# Altium PCB Ant.PcbDoc
Units mm, origin at the board's own origin, x right, y up, seen from the top; angles counter-clockwise.
Board outline 100.15 x 83.33 mm, 2 copper layers (Top Layer, Bottom Layer); 63 components, 61 nets, 249 pads, 392 vias.
Unrouted connection lines stored in the file: 1.
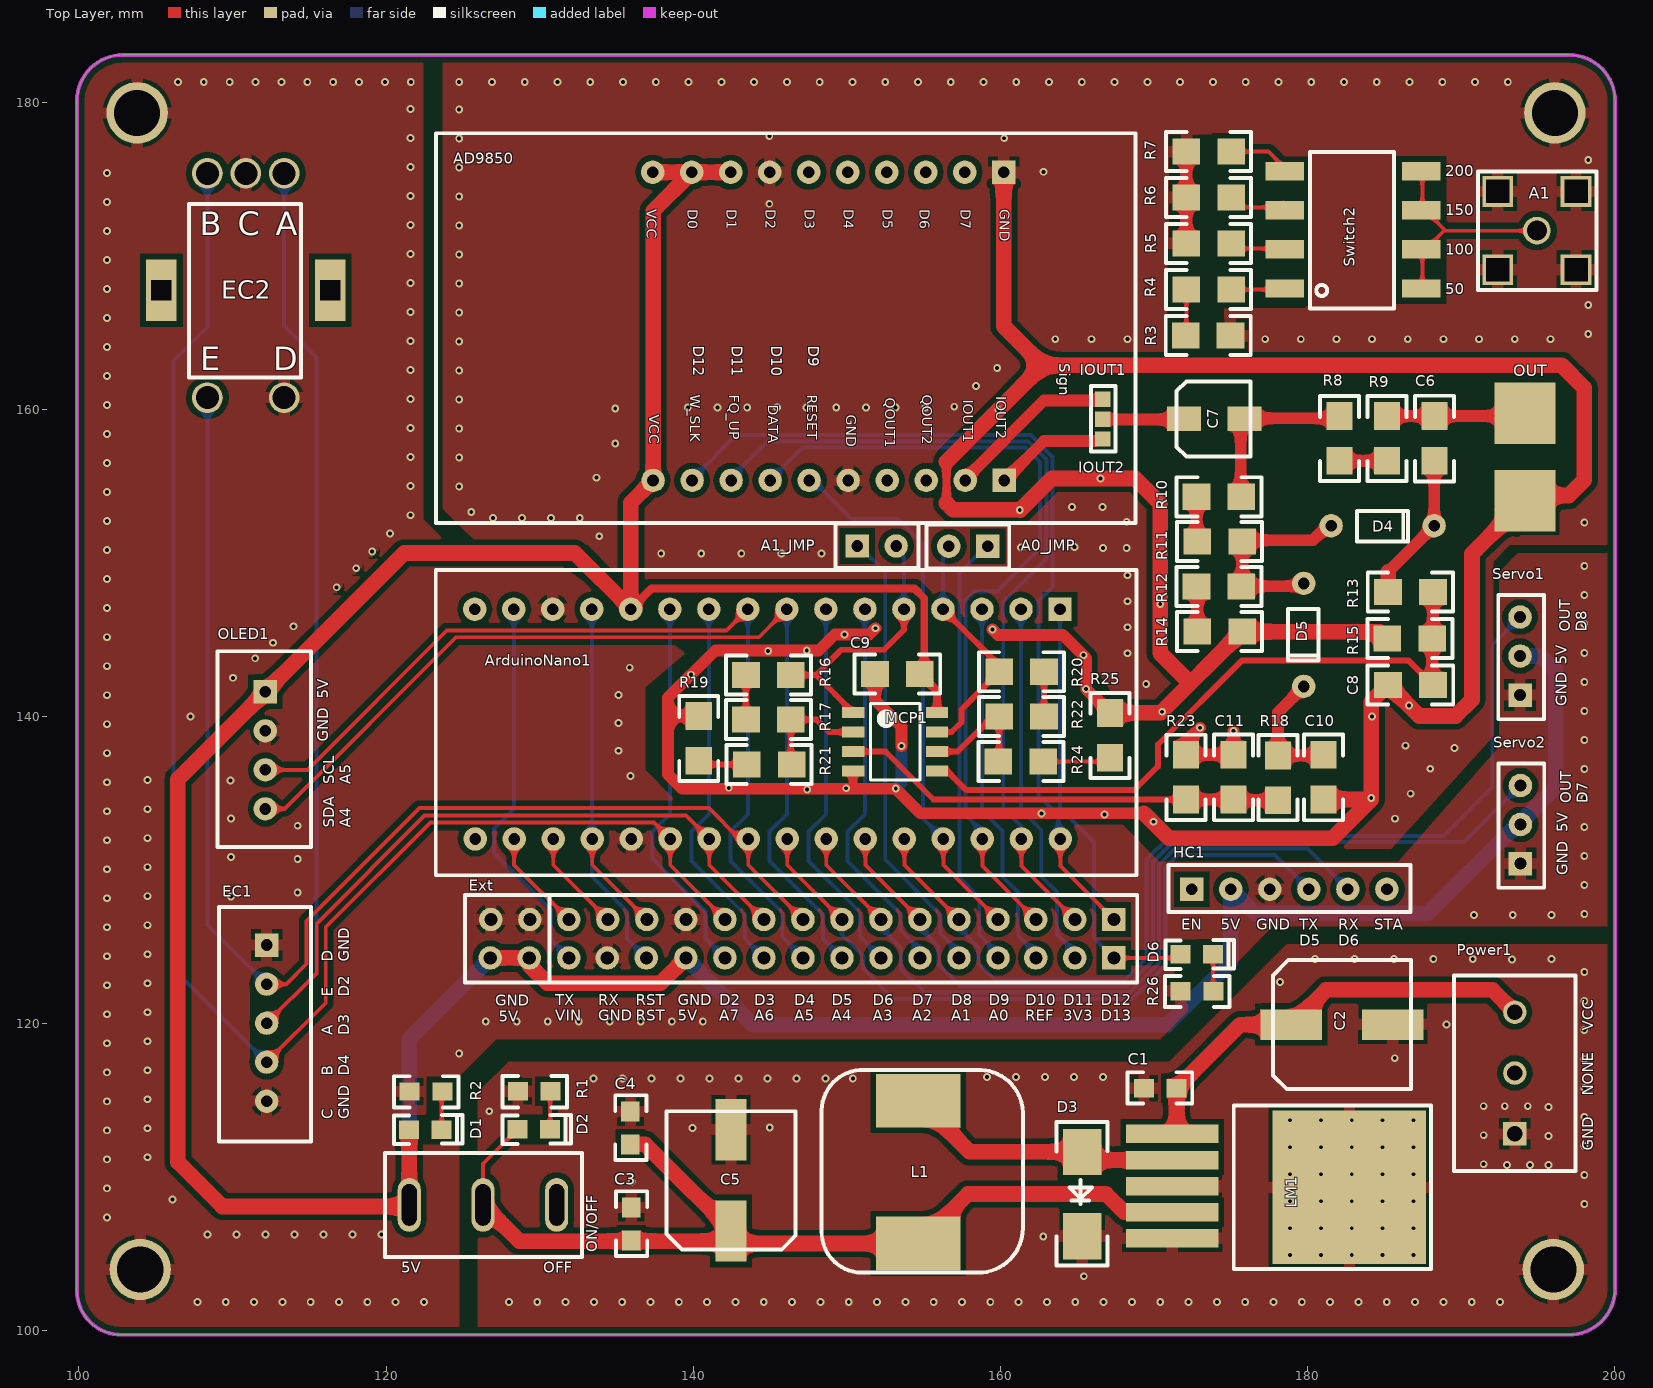
[diagram p0: Top Layer view]
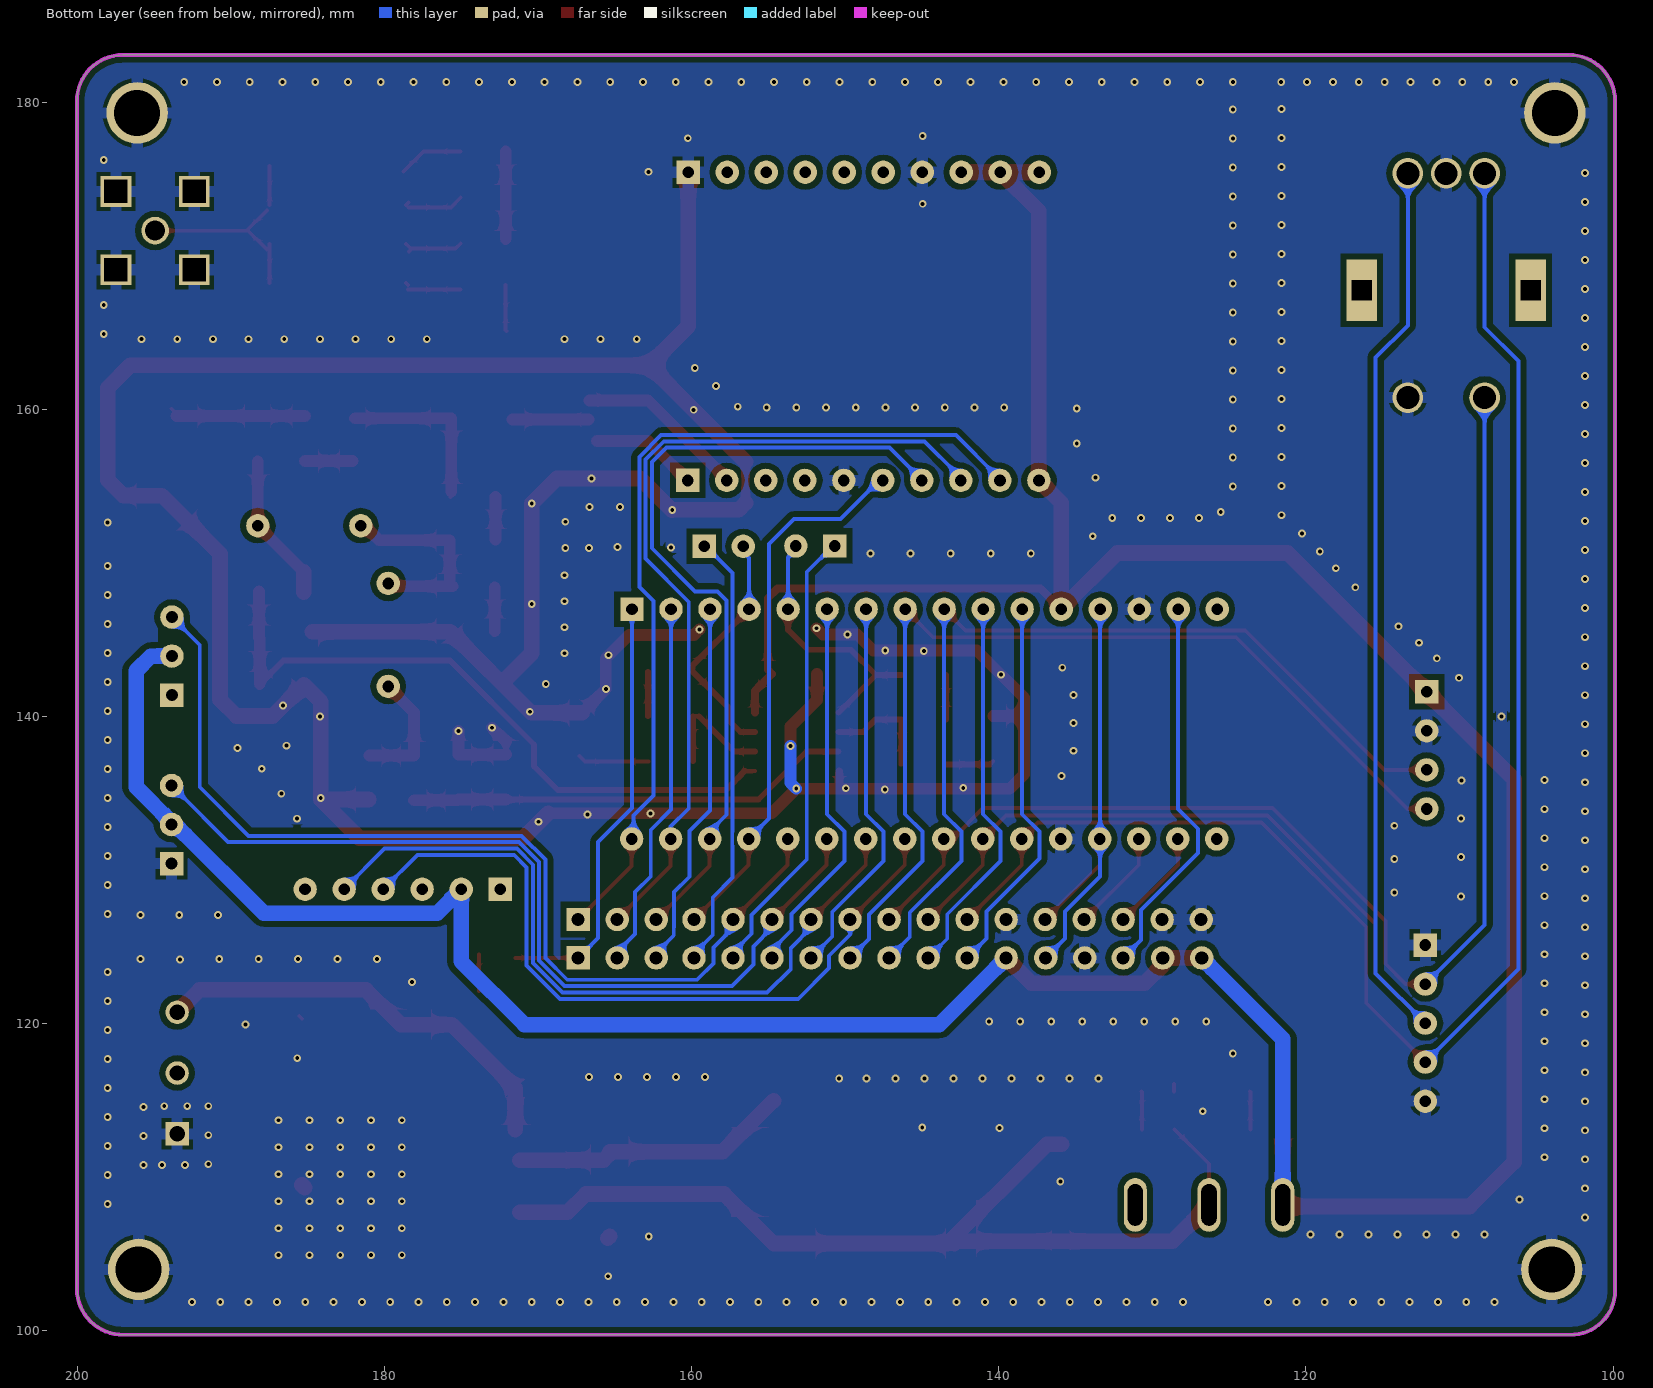
[diagram p1: Bottom Layer view, seen from below]

## Layer stack, top to bottom
Top Solder: solder mask 0.0102, Solder Resist, Dk 3.5
Top Layer: signal copper 0.0356
Dielectric 1: dielectric 0.32, FR-4, Dk 4.8
Bottom Layer: signal copper 0.0356
Bottom Solder: solder mask 0.0102, Solder Resist, Dk 3.5

## Board outline
99.873,102.599 ccw(c102.762,102.635) 102.798,99.746 197,99.746 ccw(c197.019,102.752) 200.025,102.734 200.025,180.053 ccw(c197.019,180.071) 197.037,183.078 102.9,183.078 ccw(c102.881,180.071) 99.875,180.09

## Design rules (kind name [scope] priority, off if disabled: settings)
Clearance Py [InPolygon] p1: gap=0.381 ignorepadtopadclearanceinfootprint=FALSE except(0: Arc-Hole Track-Hole SMDPad-Hole THPad-Hole Via-Hole Fill-Hole Poly-Hole Region-Hole Text-Hole)
Clearance [All] p2: gap=0.152 ignorepadtopadclearanceinfootprint=FALSE except(0: Arc-Hole Track-Hole SMDPad-Hole THPad-Hole Via-Hole Fill-Hole Poly-Hole Region-Hole Text-Hole)
PlaneClearance [All] p1: clearance=0.381
PolygonConnect [All] p1: connectstyle=Relief reliefconductorwidth=0.762 reliefentries=4 polygonreliefangle="90 Angle" airgapwidth=0.254
RoutingVias [All] p1: holewidth=0.305 width=0.61 viastyle="Through Hole" minholewidth=0.203 minwidth=0.406 maxholewidth=0.762 maxwidth=1.27
SolderMaskExpansion [All] p1: expansion=0.102
Width SIGN [InNetClass('SIGN')] p1: maxlimit=1.27 minlimit=0.508 preferedwidth=0.762
Width Power [InNetClass('Power')] p2: maxlimit=1.27 minlimit=0.152 preferedwidth=1.016
Width [All] p3: maxlimit=1.27 minlimit=0.254 preferedwidth=0.254
29 further rules are at their usual default settings.

## Components (designator, comment, footprint, x,y, rotation, side; value= is the part's Value field where it differs from the comment)
A0_JMP "JUMPER2" PIN2 159.182,151.079 r180 top
A1 "ANT" SMA 192.38,174.188 r0 top
A1_JMP "JUMPER2" PIN2 150.673,151.105 r0 top
AD9850 "AD9850" AD9850 165.506,175.692 r270 top
ArduinoNano1 "ArduinoNano" ARDUINONANO 165.913,148.514 r270 top
C1 "Cap" C0805 171.475,115.824 r180 top
C2 "Cap Pol1" C08105 178.943,119.939 r90 top
C3 "Cap" C0805 135.992,105.893 r90 top
C4 "Cap" C0805 135.941,112.141 r90 top
C5 "Cap Pol1" C08105 142.469,106.502 r180 top
C6 "Cap" C1206 188.112,159.69 r270 top
C7 "Cap Pol1" C5X5.4 172.009,159.436 r90 top
C8 "Cap" C1206 188.29,142.215 r180 top
C9 "Cap" C1206 154.889,142.926 r180 top
C10 "Cap" C1206 180.873,137.643 r270 top
C11 "Cap" C1206 175.031,137.643 r270 top
D1 "LED" LED0805 121.504,113.106 r0 top
D2 "LED" LED0805 128.566,113.115 r0 top
D3 "SR360" SR360 165.379,106.189 r90 top
D4 "1N60" 1N60 181.889,152.425 r0 top
D5 "1N60" 1N60 179.756,148.311 r270 top
D6 "LED" LED0805 171.729,124.511 r0 top
EC1 "EC11" PIN5 112.227,125.117 r270 top
EC2 "EC11" EC11 116.371,167.762 r180 top
Ext "Pin17x2" PIN17X2 167.386,126.782 r180 top
HC1 "HC05" PIN6 172.466,128.753 r0 top
L1 "Inductor" L12127 154.661,114.889 r0 top
LM1 "LM2576" LM2576 171.191,112.822 r270 top
MCP1 "MCP6002" MCP6002 153.155,138.354 r0 top
OLED1 "OLED1.3" PIN4 112.141,141.605 r270 top
ON/OFF "JUMPER3" SWITCH 121.514,108.202 r0 top
OUT "ANT" PAD2 194.158,159.651 r270 top
Power1 "PowerPad" POWER3PIN 193.497,120.747 r270 top
R1 "Res1" R0805 128.616,115.595 r0 top
R2 "Res1" R0805 121.555,115.587 r0 top
R3 "Res1" R1206 172.009,164.795 r0 top
R4 "Res1" R1206 175.082,167.793 r180 top
R5 "Res1" R1206 175.082,170.79 r180 top
R6 "Res1" R1206 175.082,173.787 r180 top
R7 "Res1" R1206 175.082,176.784 r180 top
R8 "Res1" R1206 182.067,159.614 r270 top
R9 "Res1" R1206 185.166,159.614 r270 top
R10 "Res1" R1206 172.72,154.305 r0 top
R11 "Res1" R1206 175.793,151.384 r180 top
R12 "Res1" R1206 172.72,148.463 r0 top
R13 "Res1" R1206 188.214,148.107 r180 top
R14 "Res1" R1206 175.793,145.542 r180 top
R15 "Res1" R1206 185.141,145.085 r0 top
R16 "Res1" R1206 143.383,142.697 r0 top
R17 "Res1" R1206 143.383,139.797 r0 top
R18 "Res1" R1206 178.079,134.493 r90 top
R19 "Res1" R1206 140.36,140.081 r270 top
R20 "Res1" R1206 162.89,142.913 r180 top
R21 "Res1" R1206 146.456,136.881 r180 top
R22 "Res1" R1206 162.89,140.013 r180 top
R23 "Res1" R1206 172.085,137.566 r270 top
R24 "Res1" R1206 159.817,137.063 r0 top
R25 "Res1" R1206 167.132,140.284 r270 top
R26 "Res1" R0805 171.755,122.123 r0 top
Servo1 "Servo3pin" PIN3 193.581,141.395 r90 top
Servo2 "Servo3pin" PIN3 193.606,130.426 r90 top
Sign "JUM3" SWITCH3 166.624,158.09 r90 top
Switch2 "SWITCH4" SWITCH4 178.511,167.869 r90 top

## Footprints (in the part's own frame and the unit in brackets; to place one, negate y for a bottom-side part, rotate by r counter-clockwise, add the part's x,y. Pads: shape width x height; smd on the part's side, far side on the other; paste and mask are expansions set on the pad)
1N60 [mil]
  round 60 hole 30: 1(-14,0) 2(250,0)
  silkscreen extent 52,-41 184,38, body extent -96,-52 334,49, height 100
AD9850 [mil]
  rect 60x60 hole 30: 1(10,-208) 20(800,-207)
  round 60 hole 30: 2(10,-308) 3(10,-408) 4(10,-508) 5(10,-608) 6(10,-708) 7(10,-808) 8(10,-908) 9(10,-1008) 10(10,-1108) 11(800,-1107) 12(800,-1007) 13(800,-907) 14(800,-807) 15(800,-707) 16(800,-607) 17(800,-507) 18(800,-407) 19(800,-307)
  silkscreen extent -90,-1663 909,130, body extent -40,-1060 850,-157, height 180
ARDUINONANO [mil]
  rect 60x60 hole 30: 1(60,-80)
  round 60 hole 30: 2(60,-180) 3(60,-280) 4(60,-380) 5(60,-480) 6(60,-580) 7(60,-680) 8(60,-780) 9(60,-880) 10(60,-980) 11(60,-1080) 12(60,-1180) 13(60,-1280) 14(60,-1380) 15(60,-1480) 16(649,-1479) 17(649,-1379) 18(649,-1279) 19(649,-1179) 20(649,-1079) 21(649,-979) 22(649,-879) 23(649,-779) 24(649,-679) 25(649,-579) 26(649,-479) 27(649,-379) 28(649,-279) 29(649,-179) 30(649,-79) ""(60,-1580) ""(649,-1579)
  silkscreen extent -40,-1680 742,116, body extent 10,-1624 700,-24, height 180
C5X5.4 [mm]
  rect 1.6x2.2 smd: 1(-0.051,0.051) 2(-0.051,-3.886)
  silkscreen extent -2.51,-4.27 2.39,0.53, body extent -2.17,-4.13 2.13,0.47, height 5.4
C0805 [mm]
  rect 1.3x1.2 smd: 1(0,0.025) 2(2.134,0.025)
  silkscreen extent -1.02,-1.02 3.2,1.02, body extent 0.04,-0.6 2.04,0.65, height 0.8
C1206 [mm]
  rect 1.8x1.7 smd: 1(0.127,0.152) 2(3.048,0.152)
  silkscreen extent -1.19,-1.12 4.39,1.42, body extent -0.03,-0.65 3.17,0.95, height 0.95
C08105 [mm]
  rect 2x4 smd: 1(0,0) 2(0,-6.6)
  silkscreen extent -4.2,-7.8 4.2,1.2, body extent -4.19,-7.78 4.11,1.22, height 6.2
EC11 [mm]
  round 2 hole 1.5: 1(3,7) 2(8,7) 3(3,-7.6) 4(8,-7.6) 5(5.5,-7.6)
  rect 2x4 hole 1.3 square: ""(0,0) ""(11,0)
  silkscreen extent 1.9,-5.6 9.2,5.7
L12127 [mm]
  rect 5.5x3.5 smd: 1(0,0.1) 2(0,-9.2)
  silkscreen extent -6.31,-11.1 6.8,2.1, body extent -6.15,-10.69 6.35,1.81, height 6.9
LED0805 [mm]
  rect 1.3x1.2 smd: 1(-0.016,0) 2(2.117,0)
  silkscreen extent -0.99,-0.94 3.48,0.94, body extent 0.03,-0.6 2.05,0.65, height 1.1
LM2576 [mm]
  rect 1.2x6 smd: 1(0,0) 1(0,0) 2(1.7,0) 3(3.4,0) 4(5.1,0) 5(6.8,0)
  rect 10x10 smd: 3(3.48,11.532)
  silkscreen extent -1.85,4 8.79,16.84, body extent -1.37,0.6 8.63,16.27, height 5.18
MCP6002 [mm] "SOIC, 8-Leads, Body 4.90x3.85mm, Pitch 1.27mm, IPC Medium Density"
  rect 1.45x0.7 smd: 1(-2.725,1.905) 2(-2.725,0.635) 3(-2.725,-0.635) 4(-2.725,-1.905) 5(2.725,-1.905) 6(2.725,-0.635) 7(2.725,0.635) 8(2.725,1.905)
  silkscreen extent -1.6,-2.5 1.6,2.5, body extent -3.08,-2.42 2.92,2.48, height 1.7
PAD2 [mm]
  rect 4x4 smd: 1(-0.1,0) 2(5.6,0)
PIN2 [mil]
  rect 60x60 hole 30: 1(0,0)
  round 60 hole 30: 2(100,0)
  silkscreen extent -55,-56 157,57, body extent -49,-49 151,51, height 398
PIN3 [mil]
  rect 60x60 hole 30: 1(0,-10)
  round 60 hole 30: 2(100,-10) 3(200,-10)
  silkscreen extent -62,-71 257,46, body extent -53,-63 247,37, height 398
PIN4 [mil]
  rect 60x60 hole 30: 1(0,0)
  round 60 hole 30: 2(100,0) 3(200,0) 4(300,0)
  silkscreen extent -104,-122 398,117, body extent -97,-127 391,113, height 276
PIN5 [mil]
  rect 60x60 hole 30: 1(0,0)
  round 60 hole 30: 2(100,0) 3(200,0) 4(300,0) 5(400,0)
  silkscreen extent -98,-122 503,114, body extent -91,-129 496,111, height 276
PIN6 [mil]
  rect 60x60 hole 30: 1(0,0)
  round 60 hole 30: 2(100,0) 3(200,0) 4(300,0) 5(400,0) 6(500,0)
  silkscreen extent -60,-58 560,62, body extent -49,-48 551,52, height 398
PIN17X2 [mm]
  rect 1.524x1.524 hole 0.85: 1(0,0) 34(0,2.5)
  round 1.524 hole 0.85: 2(2.54,0) 3(5.08,0) 4(7.54,0) 5(10.08,0) 6(12.62,0) 7(15.16,0) 8(17.7,0) 9(20.24,0) 10(22.78,0) 11(25.32,0) 12(27.86,0) 13(30.4,0) 14(32.94,0) 15(35.48,0) 16(38.02,0) 17(40.56,0) 18(40.6,2.5) 19(38.06,2.5) 20(35.48,2.5) 21(32.98,2.5) 22(30.44,2.5) 23(27.86,2.5) 24(25.32,2.5) 25(22.78,2.5) 26(20.24,2.5) 27(17.7,2.5) 28(15.16,2.5) 29(12.62,2.5) 30(10.08,2.5) 31(7.54,2.5) 32(5.08,2.5) 33(2.54,2.5)
  silkscreen extent -1.52,-1.6 42.24,4.09, body extent -1.24,-1.27 41.94,3.81, height 10.1
POWER3PIN [mil]
  round 60 hole 39.37: 1(0,0) ""(155.91,0)
  rect 60x60 hole 39.37: 2(311.81,0)
  silkscreen extent -94,-156 407,156
R0805 [mm]
  rect 1.3x1.2 smd: 1(-0.025,0) 2(2.108,0)
  silkscreen extent -1.04,-1.04 3.17,0.99, body extent -0.18,-0.65 2.12,0.7, height 0.76
R1206 [mm]
  rect 1.8x1.7 smd: 1(0.051,0) 2(2.972,0)
  silkscreen extent -1.24,-1.27 4.29,1.27, body extent -0.03,-0.8 3.17,0.8, height 0.6
SMA [mm]
  round 1.8 hole 1.3: 1(2.55,-2.55)
  rect 2x2 hole 1.5 square: 2(0,-5.1) 2(0,0) 2(5.1,-5.1) 2(5.1,0)
  silkscreen extent -1.3,-6.43 6.43,1.3
SR360 [mm]
  rect 3x2.5 smd: 1(-0.025,0.051) 2(5.47,0.051)
  silkscreen extent -1.93,-1.6 7.41,1.73, body extent -0.18,-1.42 5.31,1.37, height 1.14
SWITCH [mm]
  oval 1.5x3.5 hole 1 slot 2.7 at 90 deg: 1(0,0) 2(4.8,0) 3(9.6,0)
  silkscreen extent -1.57,-3.4 11.25,3.38, body extent -2.25,-3.12 11.75,3.08, height 9.65
SWITCH3 [mm]
  rect 1x1 smd: 1(-0.025,-0.051) 2(2.565,-0.051) 3(1.27,-0.051)
  silkscreen extent -0.84,-0.86 3.43,0.74
SWITCH4 [mm]
  rect 1.2x2.5 smd: 1(0,0) 2(2.54,0) 3(5.08,0) 4(7.62,0) 5(0,-8.89) 6(2.54,-8.89) 7(5.08,-8.89) 8(7.62,-8.89)
  silkscreen extent -1.3,-7.11 8.89,-1.65

## Part data
C1 C3 C4 C6 C8 C9 C10 C11: "Capacitor"
C2 C5 C7: "Polarized Capacitor (Radial)"
D1 D2 D6: library part LED0, "Typical INFRARED GaAs LED"
D3: library part "D Zener", "Zener Diode"
D4 D5: library part Diode, "Default Diode"
R1 R2 R3 R4 R5 R6 R7 R8 R9 R10 R11 R12 R13 R14 R15 R16 R17 R18 R19 R20 R21 R22 R23 R24 R25 R26: "Resistor"

## Free pads (board coordinates)
  round 4 hole 3: ""(103.8,179.3) ""(104,104) ""(196,104) ""(196.1,179.3)

## Via types
v1: diameter 0.508, hole 0.254, Top Layer to Bottom Layer, tented both sides, 362 vias
v2: diameter 0.508, hole 0.254, Top Layer to Bottom Layer, 30 vias

## Nets (pads, with @x,y where several pads share a name; then routed paths per layer and width w, separated by ;. In a path a pad name is that pad's centre, name@x,y a point inside that pad or via, vN(x,y) a via of type N, cw(c..) or ccw(c..) an arc to the next point about the centre after c; other vN are vias at no path point)
3V3: ArduinoNano1.2 Ext.33 | length 24.2
  Bottom Layer w0.254: ArduinoNano1.2 161.341,133.934 162.662,132.613 162.662,129.591 163.69,128.562 163.69,125.844 164.846,124.689 Ext.33
+5V: AD9850.8 AD9850.9 AD9850.10 AD9850.11 ArduinoNano1.12 C9.1 D1.1 Ext.18 Ext.19 Ext.23 HC1.2 MCP1.8 OLED1.1 ON/OFF.1 Servo1.2 Servo2.2 | length 257.1
  Top Layer w0.508: ArduinoNano1.12 137.287,148.336 154.407,148.336 155.042,147.701 155.042,143.053 C9.1@154.965,142.977 ; C9.1 155.88,141.656 MCP1.8
  Top Layer w1.016: ON/OFF.1@121.412,108.1 109.349,108.1 106.451,110.998 106.451,135.915 OLED1.1 121.183,150.647 132.283,150.647 ArduinoNano1.12 135.941,153.924 AD9850.11 137.389,172.923 AD9850.9 ; ON/OFF.1 D1.1@121.514,113.005 ; Ext.18 Ext.19 129.326,123.81 130.505,122.631 137.875,122.631 Ext.23@139.526,124.282 ; AD9850.10 AD9850.9 ; AD9850.8 AD9850.9
  Bottom Layer w0.381: Servo2.2 Servo2.2@193.86,133.103
  Bottom Layer w1.016: ON/OFF.1 121.514,119.01 Ext.18 ; Ext.23 143.869,119.939 170.891,119.939 175.006,124.054 HC1.2 176.555,127.203 187.858,127.203 Servo2.2@193.37,132.715 ; Servo1.2 195.206,143.935 196.164,142.977 196.164,135.407 Servo2.2@193.86,133.103
A0: A0_JMP.2 ArduinoNano1.4 MCP1.7 R20.2 | length 15.8
  Top Layer w0.254: ArduinoNano1.4 ArduinoNano1.4@156.489,146.761 ; R20.2 R20.2@159.918,143.332
  Top Layer w0.381: MCP1.7 156.82,138.989 157.48,139.649 157.48,140.475 R20.2 ; ArduinoNano1.4@156.743,146.507 R20.2@159.918,143.332
  Bottom Layer w0.254: ArduinoNano1.4 156.261,150.317 156.642,150.698 A0_JMP.2@156.642,151.206
A0_JMP: A0_JMP.1 Ext.31 | length 28.8
  Bottom Layer w0.254: A0_JMP.1@159.182,151.206 157.328,149.352 157.328,132.496 157.353,132.471 157.353,131.587 157.328,131.562 157.328,129.515 158.623,128.219 158.623,125.781 159.846,124.558 Ext.31@159.846,124.282
A1: A1_JMP.2 ArduinoNano1.5 MCP1.1 R16.2 | length 18
  Top Layer w0.254: ArduinoNano1.5@153.492,146.761 ArduinoNano1.5
  Top Layer w0.381: R16.2 147.879,142.697 ; MCP1.1 147.991,142.697 149.642,144.348 152.425,144.348 153.721,145.644 ArduinoNano1.5
  Bottom Layer w0.254: A1_JMP.2@153.213,151.232 153.213,150.851 153.721,150.343 ArduinoNano1.5
A1_JMP: A1_JMP.1 Ext.30 | length 29.7
  Bottom Layer w0.254: A1_JMP.1@150.673,151.232 152.502,149.403 152.502,130.681 156.108,127.074 156.108,125.857 157.306,124.659 Ext.30@157.306,124.282
A2: ArduinoNano1.6 Ext.29 | length 25.1
  Bottom Layer w0.254: ArduinoNano1.6 151.181,133.638 150.05,132.508 150.05,130.592 153.492,127.15 153.492,126.086 154.766,124.812 Ext.29@154.766,124.282
A3: ArduinoNano1.7 Ext.28 | length 25.1
  Bottom Layer w0.254: ArduinoNano1.7 148.641,133.638 147.511,132.508 147.511,130.592 150.842,127.261 150.842,125.666 Ext.28@152.226,124.282
A4: ArduinoNano1.8 Ext.27 OLED1.4 | length 64.1
  Top Layer w0.254: OLED1.4 113.386,133.985 124.562,145.161 144.272,145.161 ArduinoNano1.8@145.618,146.507 ; ArduinoNano1.8@145.872,146.761 ArduinoNano1.8
  Bottom Layer w0.254: ArduinoNano1.8 146.101,133.638 144.97,132.508 144.97,130.592 148.463,127.1 148.463,125.505 Ext.27@149.686,124.282
A5: ArduinoNano1.9 Ext.26 OLED1.3 | length 60.5
  Top Layer w0.254: OLED1.3 114.884,136.525 123.952,145.593 142.164,145.593 ArduinoNano1.9@143.078,146.507 ; ArduinoNano1.9@143.332,146.761 ArduinoNano1.9
  Bottom Layer w0.254: ArduinoNano1.9 143.561,133.638 142.43,132.508 142.43,130.592 145.796,127.227 145.796,125.632 Ext.26@147.146,124.282
A6: ArduinoNano1.10 Ext.25 | length 25.1
  Bottom Layer w0.254: ArduinoNano1.10 141.021,133.638 139.891,132.508 139.891,130.592 143.358,127.125 143.358,125.531 Ext.25@144.606,124.282
A7: ArduinoNano1.11 Ext.24 | length 25.1
  Bottom Layer w0.254: ArduinoNano1.11 138.481,133.638 137.35,132.508 137.35,130.746 140.792,127.305 140.792,125.556 Ext.24@142.066,124.282
D2: ArduinoNano1.20 EC1.4 EC2.4 Ext.11 | length 104.1
  Top Layer w0.254: EC1.4 116.078,121.348 116.078,126.289 122.885,133.096 137.439,133.096 ArduinoNano1.20 138.506,130.342 Ext.11@142.066,126.782
  Bottom Layer w0.254: EC2.4 108.371,165.343 106.172,163.144 106.172,123.553 EC1.4
D3: ArduinoNano1.21 EC1.3 EC2.3 Ext.10 | length 101.2
  Top Layer w0.254: EC1.3 115.494,123.304 115.494,126.531 122.516,133.553 139.522,133.553 ArduinoNano1.21 141.046,130.342 Ext.10@144.606,126.782
  Bottom Layer w0.254: EC1.3 115.468,123.278 115.468,163.373 113.371,165.47 EC2.3
D4: ArduinoNano1.22 EC1.2 EC2.2 Ext.9 | length 85.1
  Top Layer w0.254: EC1.2 113.51,122.577 114.833,123.901 114.833,126.697 122.173,134.036 141.019,134.036 143.026,132.029 ArduinoNano1.22 143.586,130.342 Ext.9@147.146,126.782
  Bottom Layer w0.254: EC2.2 108.371,126.434 EC1.2
D5: ArduinoNano1.23 Ext.8 HC1.4 | length 48.9
  Top Layer w0.254: ArduinoNano1.23 146.126,130.342 Ext.8@149.686,126.782
  Bottom Layer w0.254: Ext.8 149.686,125.791 151.054,124.423 151.054,123.622 153.06,121.615 168.577,121.615 170.739,123.777 170.739,130.175 171.552,130.988 177.851,130.988 HC1.4
D6: ArduinoNano1.24 Ext.7 HC1.5 | length 48.9
  Top Layer w0.254: ArduinoNano1.24 148.666,130.342 Ext.7@152.226,126.782
  Bottom Layer w0.254: Ext.7 152.226,126.247 153.543,124.93 153.543,123.571 155.092,122.022 168.408,122.022 170.332,123.946 170.332,130.346 171.38,131.394 179.984,131.394 HC1.5
D7: ArduinoNano1.25 Ext.6 Servo2.3 | length 57.6
  Top Layer w0.254: ArduinoNano1.25 151.206,130.342 Ext.6@154.766,126.782
  Bottom Layer w0.254: Ext.6 154.766,126.247 155.981,125.032 155.981,123.85 157.378,122.453 168.266,122.453 169.926,124.114 169.926,130.515 171.237,131.826 190.181,131.826 193.454,135.099 Servo2.3@193.454,135.506
D8: ArduinoNano1.26 Ext.5 Servo1.3 | length 64.8
  Top Layer w0.254: ArduinoNano1.26 153.746,130.342 Ext.5@157.306,126.782
  Bottom Layer w0.254: Ext.5 157.306,126.234 158.572,124.968 158.572,123.927 159.639,122.86 168.097,122.86 169.52,124.282 169.52,130.683 171.069,132.232 188.849,132.232 192.024,135.407 192.024,144.664 Servo1.3
D13: ArduinoNano1.1 D6.1 Ext.34 | length 28.3
  Top Layer w0.254: Ext.34 D6.1@171.485,124.282
  Bottom Layer w0.254: ArduinoNano1.1 163.881,134.036 166.091,131.826 166.091,125.578 Ext.34
DATA: AD9850.14 ArduinoNano1.28 Ext.3 | length 53.3
  Top Layer w0.254: ArduinoNano1.28 158.826,130.262 Ext.3
  Bottom Layer w0.254: AD9850.14@145.263,155.372 145.263,155.651 147.117,157.505 161.646,157.505 162.585,156.566 162.585,150.952 159.779,148.145 158.322,148.145 157.734,147.557 157.734,133.604 158.826,132.512 ArduinoNano1.28
FQ_UD: AD9850.13 ArduinoNano1.29 Ext.2 | length 54.7
  Top Layer w0.254: ArduinoNano1.29 161.366,130.262 Ext.2
  Bottom Layer w0.254: AD9850.13@142.723,155.804 144.831,157.912 161.814,157.912 162.992,156.734 162.992,150.275 160.185,147.469 160.185,134.019 161.366,132.837 ArduinoNano1.29
GND: A1.2 AD9850.1 AD9850.7 AD9850.16 ArduinoNano1.14 ArduinoNano1.19 C1.2 C2.2 C3.2 C4.2 C5.2 C8.2 C9.2 C10.2 C11.1 D3.1 EC1.1 EC1.5 EC2.1 EC2.5 Ext.12 Ext.16 Ext.17 Ext.21 HC1.3 LM1.3 LM1.5 MCP1.4 OLED1.2 OUT.2 pad. Power1.2 R1.1 R2.1 R3.2 R5.2 R6.2 R7.2 R14.1 R15.1 R19.1 R23.1 R25.1 R26.1 Servo1.1 Servo2.1 | length 256.7
  Top Layer w0.254: R1.1 R1.1@128.591,116.069 ; MCP1.4@150.393,136.412 MCP1.4 ; R23.1 R23.1@172.085,138.354 ; C2.2@185.369,120.32 C2.2@185.547,120.498
  Top Layer w0.406: C9.2 C9.2@151.841,142.9
  Top Layer w0.508: 150.393,135.306 MCP1.4@150.393,136.412 ; 156.489,153.899 156.489,156.591
  Top Layer w0.762: R19.1 138.354,140.03 ; C9.2 151.841,141.072 153.568,139.344 v1(153.568,138.074) ; v1(151.867,145.745) 151.46,145.339 149.225,145.339 148.184,144.297 141.427,144.297 138.354,141.224 138.354,140.03 ; v1(159.487,145.669) 159.842,145.313 164.059,145.313 165.583,143.789 v1(165.583,141.783) R25.1 ; 169.342,133.706 154.788,133.706 v1(153.187,135.306) 150.393,135.306 139.294,135.306 138.354,136.246 138.354,140.03 ; R23.1 C11.1 v1(175.184,139.065) ; R23.1@172.085,138.354 v1(172.999,139.268) ; R5.2@172.11,171.094 R6.2 R7.2 ; v1@184.15,134.595 v1(184.15,134.696)
  Top Layer w1.016: 156.489,153.899 156.921,153.467 161.239,153.467 v1(161.265,153.441) 161.29,153.441 163.347,155.499 168.783,155.499 v1(170.409,153.873) 170.409,144.12 172.263,142.265 ; 156.489,156.591 v1(159.868,159.969) 162.763,162.865 ; AD9850.1 160.223,165.405 162.763,162.865 ; D3.1 D3.1@165.47,106.022 ; R25.1 170.434,140.233 175.717,145.517 R15.1@184.709,145.517 ; 169.342,133.706 170.967,132.08 181.635,132.08 184.15,134.595 C10.2 ; v1(184.15,134.696) 184.15,140.97 C8.2 187.274,140.03 189.636,140.03 190.703,141.097 190.703,150.597 194.488,154.381 197.002,154.381 198.018,155.397 198.018,161.392 196.545,162.865 162.763,162.865 ; LM1.3@185.191,109.322 LM1.3@185.369,109.499
  Bottom Layer w0.762: v1(153.187,135.306) 153.568,135.687 v1(153.568,138.074)
  other v1: 107.721,101.879 109.565,101.879 111.409,101.879 113.253,101.879 115.096,101.879 116.94,101.879 118.784,101.879 120.627,101.879 122.471,101.879 128.002,101.879 129.846,101.879 131.69,101.879 133.533,101.879 135.377,101.879 137.221,101.879 139.064,101.879 140.908,101.879 142.752,101.879 144.596,101.879 146.439,101.879 148.283,101.879 150.127,101.879 151.97,101.879 153.814,101.879 155.658,101.879 157.501,101.879 159.345,101.879 161.189,101.879 163.033,101.879 164.876,101.879 166.72,101.879 168.564,101.879 170.407,101.879 172.251,101.879 174.095,101.879 175.939,101.879 177.782,101.879 179.626,101.879 181.47,101.879 183.313,101.879 185.157,101.879 187.001,101.879 188.845,101.879 190.688,101.879 192.532,101.879 165.433,103.556 162.791,106.147 108.378,106.274 110.266,106.274 112.155,106.274 114.044,106.274 115.933,106.274 117.821,106.274 119.71,106.274 101.829,107.391 198.018,108.256 106.096,108.56 101.829,109.28 135.994,109.728 198.018,110.145 192.987,110.795 194.488,110.795 195.682,110.802 191.465,110.853 101.829,111.169 104.47,111.303 198.018,112.034 195.682,112.691 191.465,112.741 101.829,113.058 104.47,113.192 139.957,113.208 144.986,113.233 198.018,113.923 126.723,114.3 195.682,114.579 191.465,114.63 192.837,114.63 194.338,114.63 101.829,114.946 104.47,115.08 198.018,115.811 133.505,116.434 135.394,116.434 137.283,116.434 139.172,116.434 141.06,116.434 142.949,116.434 144.838,116.434 146.727,116.434 148.615,116.434 150.393,116.434 159.131,116.535 161.02,116.535 162.909,116.535 164.797,116.535 166.686,116.535 101.829,116.835 104.47,116.969 198.018,117.7 185.677,117.754 124.765,118.059 101.829,118.724 104.47,118.858 198.018,119.589 189.055,119.939 126.492,120.142 128.511,120.142 130.531,120.142 132.55,120.142 134.569,120.142 136.588,120.142 138.608,120.142 140.627,120.142 101.829,120.613 104.47,120.747 198.018,121.478 101.829,122.501 104.47,122.635 178.206,122.707 198.018,123.366 193.319,124.181 180.492,124.206 183.058,124.206 185.623,124.206 188.189,124.206 190.754,124.206 195.885,124.206 101.829,124.39 104.47,124.524 101.829,126.279 104.47,126.413 190.83,127.076 193.357,127.076 195.885,127.076 198.018,127.144 101.829,128.168 104.47,128.302 109.906,128.288 114.249,128.542 198.018,129.033 101.829,130.056 104.47,130.191 114.249,130.713 109.906,130.853 198.018,130.921 101.829,131.945 104.47,132.079 198.018,132.81 114.249,132.885 169.977,133.147 185.699,133.35 109.906,133.368 166.776,133.629 162.687,133.68 101.829,133.834 104.47,133.968 198.018,134.699 186.715,134.976 147.422,135.255 149.962,135.331 142.316,135.357 101.829,135.723 109.88,135.839 104.47,135.857 135.915,136.119 198.018,136.588 187.985,136.601 101.829,137.612 135.128,137.77 189.56,137.947 186.385,138.1 198.018,138.477 101.829,139.5 135.128,139.586 107.264,140.003 184.201,140.005 170.536,140.31 198.018,140.365 186.614,140.716 101.829,141.389 135.128,141.402 169.494,142.113 198.018,142.254 110.033,142.518 139.852,142.723 135.865,143.18 101.829,143.278 111.481,143.788 165.405,143.993 168.275,144.12 198.018,144.143 144.882,144.272 147.396,144.297 112.649,144.804 101.829,145.167 149.86,145.339 168.275,145.813 113.97,145.871 198.018,146.032 101.829,147.055 170.409,147.32 168.275,147.506 198.018,147.92 116.789,148.412 101.829,148.944 168.275,149.2 118.059,149.655 198.018,149.809 137.916,150.622 140.525,150.622 143.135,150.622 145.745,150.622 148.355,150.622 119.101,150.748 101.829,150.833 166.675,150.978 168.224,150.978 161.341,151.003 164.821,151.028 133.883,151.74 120.269,151.916 198.018,152.629 168.224,152.679 101.829,152.722 126.975,152.933 128.854,152.933 130.734,152.933 132.613,152.933 121.59,153.11 125.552,153.314 164.668,153.645 166.649,153.645 101.829,154.61 124.765,154.973 121.59,154.999 166.522,155.499 133.706,155.55 101.829,156.499 124.765,156.862 121.59,156.887 134.925,157.785 101.829,158.388 124.765,158.751 121.59,158.776 134.925,160.045 139.649,160.122 141.582,160.122 143.516,160.122 145.449,160.122 147.382,160.122 149.315,160.122 151.249,160.122 153.182,160.122 155.115,160.122 156.997,160.172 101.829,160.277 124.765,160.639 121.59,160.665 158.42,161.519 101.829,162.166 124.765,162.528 121.59,162.554 159.791,162.687 101.829,164.054 124.765,164.417 121.59,164.442 163.576,164.567 165.925,164.567 168.275,164.567 177.241,164.567 179.562,164.567 181.883,164.567 184.204,164.567 186.525,164.567 188.846,164.567 191.167,164.567 193.488,164.567 195.809,164.567 198.272,164.906 101.829,165.943 124.765,166.306 121.59,166.331 198.272,166.795 101.829,167.832 124.765,168.195 121.59,168.22 101.829,169.721 124.765,170.083 121.59,170.109 101.829,171.609 124.765,171.972 121.59,171.998 144.958,173.38 101.829,173.498 124.765,173.861 121.59,173.886 101.829,175.387 162.814,175.463 124.765,175.75 121.59,175.775 198.272,176.239 124.765,177.638 160.249,177.648 121.59,177.664 144.958,177.8 124.765,179.527 121.59,179.553 106.451,181.305 108.136,181.305 109.821,181.305 111.506,181.305 113.191,181.305 114.876,181.305 116.561,181.305 118.245,181.305 119.93,181.305 121.615,181.305 124.765,181.305 126.898,181.305 129.032,181.305 131.166,181.305 133.299,181.305 135.433,181.305 137.566,181.305 139.7,181.305 141.834,181.305 143.967,181.305 146.101,181.305 148.234,181.305 150.368,181.305 152.502,181.305 154.635,181.305 156.769,181.305 158.902,181.305 161.036,181.305 163.17,181.305 165.303,181.305 167.437,181.305 169.57,181.305 171.704,181.305 173.838,181.305 175.971,181.305 178.105,181.305 180.238,181.305 182.372,181.305 184.506,181.305 186.639,181.305 188.773,181.305 190.906,181.305 193.04,181.305
  other v2: 178.867,104.927 180.873,104.927 182.88,104.927 184.887,104.927 186.893,104.927 178.867,106.685 180.873,106.685 182.88,106.685 184.887,106.685 186.893,106.685 178.867,108.443 180.873,108.443 182.88,108.443 184.887,108.443 186.893,108.443 178.867,110.2 180.873,110.2 182.88,110.2 184.887,110.2 186.893,110.2 178.867,111.958 180.873,111.958 182.88,111.958 184.887,111.958 186.893,111.958 178.867,113.716 180.873,113.716 182.88,113.716 184.887,113.716 186.893,113.716
NetA1_1: A1.1 Switch2.5 Switch2.6 Switch2.7 Switch2.8 | length 14.8
  Top Layer w0.254: Switch2.5@187.477,168.224 Switch2.6@187.477,170.764 ; Switch2.7@187.477,173.304 Switch2.8@187.477,175.844 ; Switch2.6@187.655,170.409 188.874,171.628 188.976,171.628 ; Switch2.7@187.655,172.949 188.976,171.628 ; A1.1@194.97,171.628 188.976,171.628
NetAD9850_19: AD9850.19 Sign.2 | length 11.1
  Top Layer w0.305: AD9850.19@157.963,155.372 AD9850.19@157.963,155.702
  Top Layer w0.762: AD9850.19@157.963,155.702 162.839,160.579 Sign.2@166.675,160.579
NetAD9850_20: AD9850.20 Sign.1 | length 6.9
  Top Layer w0.305: AD9850.20@160.503,155.372 AD9850.20@160.503,155.6
  Top Layer w0.762: AD9850.20@160.503,155.6 162.839,157.937 166.167,157.937
NetC3_1: C3.1 C4.1 C5.1 D2.1 L1.2 LM1.4 ON/OFF.2 | length 63.3
  Top Layer w0.254: ON/OFF.2 126.314,110.879 D2.1
  Top Layer w1.016: ON/OFF.2 128.674,105.842 142.758,105.842 C5.1@142.911,105.689 ; C4.1 136.881,112.141 143.332,105.689 L1.2 157.886,108.915 166.878,108.915 168.072,107.722 LM1.4
NetC6_1: C6.1 OUT.1 R9.1 | length 9
  Top Layer w0.254: OUT.1@193.563,159.563 193.563,159.731 OUT.1@193.87,160.038
  Top Layer w0.762: R9.1 C6.1 OUT.1@193.563,159.563
NetC6_2: C6.2 D4.2 R13.2 | length 9.8
  Top Layer w0.254: C6.2@188.239,156.616 C6.2
  Top Layer w0.762: 185.242,149.428 D4.2 C6.2@188.239,156.616
  Top Layer w1.016: R13.2 185.242,149.428
NetC7_1: C7.1 Sign.3 | length 5.2
  Top Layer w0.305: Sign.3@166.573,159.461 Sign.3@166.7,159.334
  Top Layer w0.762: Sign.3@166.7,159.334 C7.1@171.679,159.334
NetC7_2: C7.2 R8.1 R10.2 | length 11.4
  Top Layer w0.254: R10.2@175.641,154.381 175.641,154.356 R10.2 ; R8.1@181.915,159.41 R8.1
  Top Layer w0.762: R10.2@175.641,154.635 175.641,159.41 R8.1@181.915,159.41
NetC8_1: C8.1 MCP1.5 R13.1 R15.2 | length 43.8
  Top Layer w0.254: MCP1.5 MCP1.5@156.54,136.449 ; R15.2 R15.2@188.163,145.135
  Top Layer w0.381: MCP1.5@156.54,136.449 157.785,135.204 168.707,135.204 170.256,136.754 170.256,138.176 175.717,143.637 186.588,143.637 C8.1@188.112,142.113
  Top Layer w0.762: C8.1@188.112,142.113 R15.2 ; R15.2@188.163,145.135 R13.1@188.163,148.158
NetC10_1: C10.1 D5.2 R18.2 | length 8.2
  Top Layer w0.254: C10.1@180.975,137.465 C10.1
  Top Layer w0.762: D5.2 178.079,140.284 R18.2 C10.1@180.975,137.465
NetC11_2: C11.2 MCP1.3 R18.1 R23.2 | length 29
  Top Layer w0.254: C11.2 C11.2@175.235,134.544
  Top Layer w0.381: MCP1.3 152.527,137.719 155.651,134.595 R23.2
  Top Layer w0.762: R23.2 C11.2 ; C11.2@175.235,134.544 R18.1
NetD1_2: D1.2 R2.2 | length 2.5
  Top Layer w0.254: D1.2 123.622,115.545 R2.2
NetD2_2: D2.2 R1.2 | length 2.5
  Top Layer w0.254: D2.2 130.683,115.554 R1.2
NetD4_1: D4.1 D5.1 R11.1 R12.2 | length 13.5
  Top Layer w0.254: R12.2@175.543,148.488 R12.2@175.743,148.688 ; D5.1@179.578,148.488 D5.1 ; D4.1@181.305,152.425 D4.1
  Top Layer w0.762: R12.2@175.543,148.488 D5.1@179.578,148.488 ; R12.2@175.743,148.688 175.743,151.471 180.351,151.471 D4.1@181.305,152.425
NetD6_2: D6.2 R26.2 | length 2.4
  Top Layer w0.254: R26.2@173.847,122.139 D6.2
NetMCP1_2: MCP1.2 R17.2 R21.1 | length 7.3
  Top Layer w0.254: R21.1@146.355,136.931 R21.1
  Top Layer w0.381: R21.1@146.355,136.931 R17.2 148.035,139.797 148.844,138.989 MCP1.2
NetMCP1_6: MCP1.6 R22.2 R24.1 | length 8
  Top Layer w0.254: R22.2@159.521,140.013 R22.2 ; R24.1 R24.1@159.918,137.113
  Top Layer w0.381: MCP1.6 157.226,137.719 R22.2@159.521,140.013 ; R24.1@159.918,137.113 R22.2
NetR3_1: R3.1 R4.2 | length 3
  Top Layer w0.254: R3.1@172.06,165.1 172.11,165.151 R4.2@172.11,168.097
NetR4_1: R4.1 Switch2.1 | length 3.6
  Top Layer w0.254: R4.1 Switch2.1@178.461,167.793 ; Switch2.1@178.461,168.097 Switch2.1@178.587,168.224
NetR5_1: R5.1 Switch2.2 | length 3.8
  Top Layer w0.254: R5.1 175.362,170.459 178.232,170.459 Switch2.2@178.41,170.282 ; Switch2.2@178.41,170.586 Switch2.2@178.587,170.764
NetR6_1: R6.1 Switch2.3 | length 3.9
  Top Layer w0.254: R6.1 175.666,173.152 Switch2.3@178.435,173.152 ; Switch2.3@178.435,173.457 Switch2.3@178.587,173.304
NetR7_1: R7.1 Switch2.4 | length 4.3
  Top Layer w0.254: R7.1 177.47,176.784 Switch2.4@178.765,175.489
NetR8_2: R8.2 R9.2 | length 3.1
  Top Layer w0.762: R8.2 R9.2
NetR10_1: R10.1 R11.2 | length 2.9
  Top Layer w0.254: R11.2@172.771,151.522 R11.2@172.822,151.471
  Top Layer w0.762: R11.2@172.771,151.522 R10.1
NetR12_1: R12.1 R14.2 | length 2.9
  Top Layer w0.254: R12.1 R12.1@172.822,148.412
  Top Layer w0.762: R14.2 R12.1@172.822,148.412
NetR16_1: R16.1 R17.1 | length 2.9
  Top Layer w0.381: R17.1 R16.1
NetR19_2: R19.2 R21.2 | length 3.2
  Top Layer w0.254: R19.2 R19.2@140.589,136.881
  Top Layer w0.381: R19.2@140.589,136.881 R21.2
NetR20_1: R20.1 R22.1 | length 2.9
  Top Layer w0.381: R22.1 R20.1
NetR24_2: R24.2 R25.2 | length 4.7
  Top Layer w0.254: R24.2 166.933,137.063 R25.2@167.31,137.439
OUT: D3.2 L1.1 LM1.2 | length 18.2
  Top Layer w1.016: L1.1 157.992,111.658 D3.2 ; D3.2@165.265,111.595 165.738,111.122 LM1.2
REF: ArduinoNano1.3 Ext.32 | length 24.2
  Bottom Layer w0.254: ArduinoNano1.3 158.801,133.883 160.147,132.537 160.147,129.565 161.15,128.562 161.15,126.291 161.163,126.278 161.163,125.755 162.306,124.612 Ext.32
RESET: AD9850.15 ArduinoNano1.27 Ext.4 | length 35.3
  Top Layer w0.254: ArduinoNano1.27 156.286,130.342 Ext.4@159.846,126.782
  Bottom Layer w0.254: AD9850.15@147.803,155.372 150.317,152.857 153.34,152.857 154.965,151.232 154.965,133.35 ArduinoNano1.27
RST: ArduinoNano1.13 ArduinoNano1.18 Ext.13 Ext.22 | length 30.9
  Top Layer w0.254: ArduinoNano1.18 133.426,130.342 Ext.13@136.986,126.782
  Bottom Layer w0.254: ArduinoNano1.13 133.401,129.591 135.687,127.305 135.687,125.541 Ext.22
RX: ArduinoNano1.17 Ext.14 | length 6.7
  Top Layer w0.254: ArduinoNano1.17 130.886,130.342 Ext.14@134.446,126.782
TX: ArduinoNano1.16 Ext.15 | length 6.7
  Top Layer w0.254: ArduinoNano1.16 128.346,130.342 Ext.15@131.906,126.782
VCC: C1.1 C2.1 LM1.1 Power1.1 | length 28
  Top Layer w1.016: LM1.1@171.475,113.106 C1.1 175.616,119.939 C2.1 181.204,122.199 192.045,122.199 Power1.1
VIN: ArduinoNano1.15 Ext.20 | length 25.3
  Bottom Layer w0.254: ArduinoNano1.15 128.321,133.985 127.025,132.69 127.025,131.115 130.734,127.406 130.734,125.454 Ext.20@131.906,124.282
W_CLK: AD9850.12 ArduinoNano1.30 Ext.1 | length 57.9
  Top Layer w0.254: ArduinoNano1.30 163.906,130.262 Ext.1
  Bottom Layer w0.254: AD9850.12@140.132,155.423 140.132,155.651 142.799,158.318 161.982,158.318 163.398,156.902 163.398,148.426 162.484,147.512 162.484,134.858 163.779,133.563 163.779,132.664 164.16,132.283 ArduinoNano1.30
pads on no net: AD9850.2 AD9850.3 AD9850.4 AD9850.5 AD9850.6 AD9850.17 AD9850.18 ArduinoNano1. EC2. HC1.1 HC1.6 ON/OFF.3 Power1.

## Polygon pours and split planes (outlines as drawn)
GND on Top Layer "Top Overlay-No Net" (solid, remove dead copper, pour order 16): 123.698,183.566 123.698,153.543 125.07,152.171 126.06,151.181 133.121,151.181 137.744,146.558 137.744,136.398 139.979,134.163 152.73,134.163 154.711,132.182 154.737,132.182 168.732,132.182 169.215,131.699 169.52,131.394 182.194,131.394 185.445,131.394 192.075,138.709 192.075,150.089 193.167,151.181 200.635,151.181 200.635,183.388 199.949,184.074
GND on Top Layer "Top Overlay-No Net" (solid, remove dead copper, pour order 14): 200.736,126.34 177.749,126.34 170.409,118.999 127.178,118.999 124.765,116.586 124.765,98.552 99.466,98.552 97.028,102.988 97.028,105.054 97.028,188.011 97.13,188.112 122.428,188.112 122.428,152.857 124.562,150.724 124.968,150.317 130.708,150.317 139.497,144.145 136.881,141.91 136.881,136.525 138.963,134.442 166.472,134.442 170.358,130.556 185.903,130.556 189.89,135.077 192.481,138.028 192.481,149.403 193.7,150.622 200.939,150.622 200.99,150.673
GND on Top Layer "Top Overlay-No Net" (solid, remove dead copper, pour order 10): 201.524,125.171 178.638,125.171 171.552,118.085 170.993,117.526 127.991,117.526 126.314,115.849 125.959,115.494 125.959,110.693 125.959,98.806 126.365,98.4 126.594,98.171 200.889,98.171
GND on Bottom Layer "Top Overlay-No Net" (solid, remove dead copper, pour order 18): 98.933,184.633 99.06,184.506 202.489,184.506 202.489,99.492 200.584,97.587 199.085,99.085 98.12,99.085

## Keep-outs
Keep-Out Layer:
  the board outline again, w0.254

## Other copper
Top Layer:
  pour cut-out: 175.717,143.637 170.713,138.633 170.713,134.825 170.993,134.546 170.993,132.893 181.483,132.893 181.639,133.049 181.639,135.794 181.782,135.794 182.296,135.28 182.347,135.331 183.413,135.331 183.413,141.148 184.404,142.138 184.404,143.637
  pour cut-out: 143.027,143.84 143.002,143.815 141.097,143.815 141.097,143.535 138.557,140.995 138.633,140.919 138.633,135.661 153.06,135.661 153.544,135.177 170.993,135.177 170.993,138.963 167.361,141.376 165.202,144.755 155.473,144.755 154.305,145.923
  pour cut-out: 175.651,176.47 175.946,176.174 175.946,166.573 179.828,166.573 180.142,166.888 180.142,176.47
  pour cut-out: 170.682,124.8 171.323,124.159 171.323,122.707 171.958,122.707 172.288,122.377 172.212,122.301 172.212,120.65 173.406,120.65 173.482,120.574 173.847,120.939 173.847,124.511
  pour cut-out: 170.956,175.68 170.956,174.891 171.342,174.891 171.342,175.68
  pour cut-out: 170.956,172.683 170.956,171.894 171.342,171.894 171.342,172.683
  pour cut-out: 170.891,170.447 170.79,163.551 170.891,163.449 174.574,163.449 174.574,170.447
  pour cut-out: 185.77,166.888 185.77,176.47 189.032,176.47 189.032,166.888
  pour cut-out: 111.114,122.279 111.114,117.199 112.144,117.199 113.868,118.923 113.868,122.403
  pour cut-out: 122.632,114.606 122.632,113.994 122.707,113.919 122.733,113.944 123.266,113.944 123.266,114.656 123.317,114.706
  pour cut-out: 156.947,156.845 157.836,155.956 157.836,154.203 161.138,154.203 162.738,155.804 168.478,155.804 170.688,153.594 170.942,153.594 170.942,143.154 171.679,142.418 172.872,143.612 187.452,143.612 187.731,143.891 188.824,142.799 188.824,140.868 189.484,140.868 190.627,142.011 190.627,150.317 191.414,150.317 195.783,154.686 197.18,154.686 198.222,155.727 198.018,155.931 198.018,161.366 196.266,163.119 196.012,162.865 162.763,162.865
  pour cut-out: 172.83,177.888 172.568,177.521 172.568,169.189 172.898,168.859 173.558,169.52 176.251,169.52 176.251,177.597 175.906,177.888
Bottom Layer:
  pour cut-out: 155.346,133.223 155.88,133.121 156.921,133.121 156.921,146.253 157.175,146.507 156.972,146.71 154.584,146.71
  pour cut-out: 192.395,135.804 196.002,135.804 191.465,131.267 189.433,131.267 188.646,132.055
  pour cut-out: 192.507,145.593 192.71,145.796 194.716,145.796 194.716,143.891 195.834,142.773 195.758,142.697 195.758,135.712 195.58,135.534 195.428,135.687 192.253,135.687
  pour cut-out: 140.386,125.857 140.386,123.422 143.869,119.939 170.713,119.939 170.713,120.345 175.692,125.324 175.692,127.737 180.797,127.737 180.188,128.346 180.188,130.581 177.241,130.581 176.378,131.445 176.022,131.089 170.967,131.089 170.967,124.155 168.681,121.869 154.94,121.869 148.946,127.864

## Silkscreen, mask and mechanical layers (free items; w line width, h text height)
Top Overlay:
  text "200" at 188.951,175.184 h0.71
  text "150" at 188.951,172.644 h0.71
  text "100" at 188.951,170.053 h0.71
  text "50" at 188.951,167.488 h0.71
  text "D12" at 140.005,164.135 h0.71 r270
  text "D11" at 142.519,164.135 h0.71 r270
  text "D10" at 145.085,164.135 h0.71 r270
  text "D9" at 147.498,164.135 h0.71 r270
  text "IOUT1" at 165.176,162.204 h0.71
  text "IOUT2" at 165.075,155.88 h0.71
  text "OUT / D8" at 198.171,145.517 h0.71 r90
  text "5V" at 196.86,143.358 h0.71 r90
  text "5V" at 116.226,141.148 h0.71 r90
  text "GND" at 196.86,140.665 h0.71 r90
  text "GND" at 116.226,138.354 h0.71 r90
  text "SCL / A5" at 117.709,135.585 h0.71 r90
  text "OUT / D7" at 198.247,134.341 h0.71 r90
  text "SDA / A4" at 117.709,132.766 h0.71 r90
  text "5V" at 196.937,132.461 h0.71 r90
  text "GND" at 196.937,129.667 h0.71 r90
  text "EN" at 171.78,126.111 h0.71
  text "5V" at 174.335,126.111 h0.71
  text "GND" at 176.657,126.111 h0.71
  text "TX" at 179.446,126.111 h0.71
  text "RX" at 181.991,126.111 h0.71
  text "STA" at 184.328,126.111 h0.71
  text "D5" at 179.446,125.07 h0.71
  text "D6" at 181.991,125.07 h0.71
  text "D / GND" at 117.597,124.028 h0.71 r90
  text "E / D2" at 117.597,121.768 h0.71 r90
  text "TX" at 131.013,121.209 h0.71
  text "RX" at 133.833,121.209 h0.71
  text "RST" at 136.246,121.209 h0.71
  text "GND" at 138.989,121.209 h0.71
  text "D2" at 141.707,121.209 h0.71
  text "D3" at 143.967,121.209 h0.71
  text "D4" at 146.583,121.209 h0.71
  text "D5" at 149.022,121.209 h0.71
  text "D6" at 151.689,121.209 h0.71
  text "D7" at 154.254,121.209 h0.71
  text "D8" at 156.794,121.209 h0.71
  text "D9" at 159.258,121.209 h0.71
  text "D10" at 161.62,121.209 h0.71
  text "D11" at 164.109,121.209 h0.71
  text "D12" at 166.548,121.209 h0.71
  text "GND" at 127.102,121.183 h0.71
  text "VIN" at 131.013,120.193 h0.71
  text "GND" at 133.833,120.193 h0.71
  text "RST" at 136.246,120.193 h0.71
  text "5V" at 138.989,120.193 h0.71
  text "A7" at 141.707,120.193 h0.71
  text "A6" at 143.967,120.193 h0.71
  text "A5" at 146.583,120.193 h0.71
  text "A4" at 149.022,120.193 h0.71
  text "A3" at 151.689,120.193 h0.71
  text "A2" at 154.254,120.193 h0.71
  text "A1" at 156.794,120.193 h0.71
  text "A0" at 159.258,120.193 h0.71
  text "REF" at 161.62,120.193 h0.71
  text "3V3" at 164.109,120.193 h0.71
  text "D13" at 166.548,120.193 h0.71
  text "5V" at 127.356,120.142 h0.71
  text "VCC" at 198.603,119.532 h0.71 r90
  text "A / D3" at 117.597,119.253 h0.71 r90
  text "B / D4" at 117.597,116.611 h0.71 r90
  text "NONE" at 198.603,115.316 h0.71 r90
  text "C / GND" at 117.597,113.792 h0.71 r90
  text "GND" at 198.603,111.735 h0.71 r90
  text "5V" at 121.006,103.784 h0.71
  text "OFF" at 130.251,103.784 h0.71

## Text inside footprints (layer, text, board x,y; h text height)
AD9850: Top Overlay "GND" at 159.969,173.025 h0.66 r270; Top Overlay "D7" at 157.429,173.025 h0.66 r270; Top Overlay "D6" at 154.762,173.025 h0.66 r270; Top Overlay "D5" at 152.349,173.025 h0.66 r270; Top Overlay "D4" at 149.809,173.025 h0.66 r270; Top Overlay "D3" at 147.269,173.025 h0.66 r270; Top Overlay "D2" at 144.729,173.025 h0.66 r270; Top Overlay "D1" at 142.189,173.025 h0.66 r270; Top Overlay "D0" at 139.649,173.025 h0.66 r270; Top Overlay "VCC" at 136.982,173.025 h0.66 r270; Top Overlay "VCC" at 137.135,159.639 h0.66 r270; Top Overlay "W_SLK" at 139.802,160.96 h0.66 r270; Top Overlay "FQ_UP" at 142.342,160.96 h0.66 r270; Top Overlay "DATA" at 144.882,160.3 h0.66 r270; Top Overlay "RESET" at 147.422,160.96 h0.66 r270; Top Overlay "GND" at 149.962,159.639 h0.66 r270; Top Overlay "QOUT1" at 152.502,160.74 h0.66 r270; Top Overlay "QOUT2" at 154.915,160.96 h0.66 r270; Top Overlay "IOUT1" at 157.582,160.63 h0.66 r270; Top Overlay "IOUT2" at 159.741,160.85 h0.66 r270
EC2: Top Overlay "B" at 107.887,171.343 h1.52; Top Overlay "C" at 110.351,171.343 h1.52; Top Overlay "A" at 112.815,171.343 h1.52; Top Overlay "E" at 107.913,162.555 h1.52; Top Overlay "D" at 112.663,162.555 h1.52